# EAGLE board MiłoszGustawski (EAGLE 7.7.0)
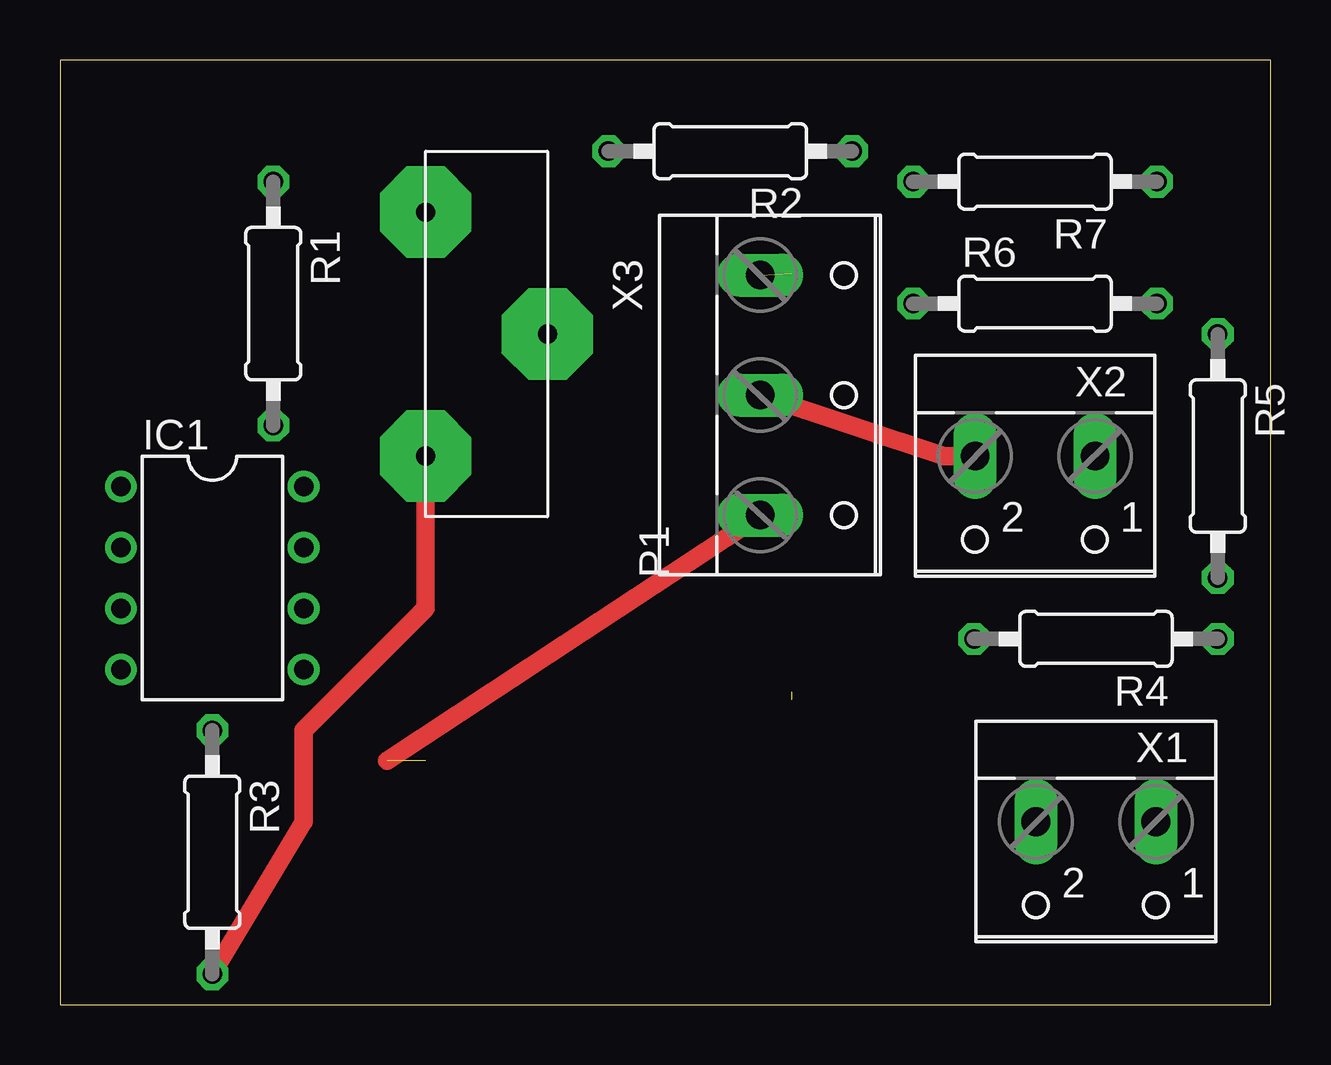
[diagram p0: board, top side]
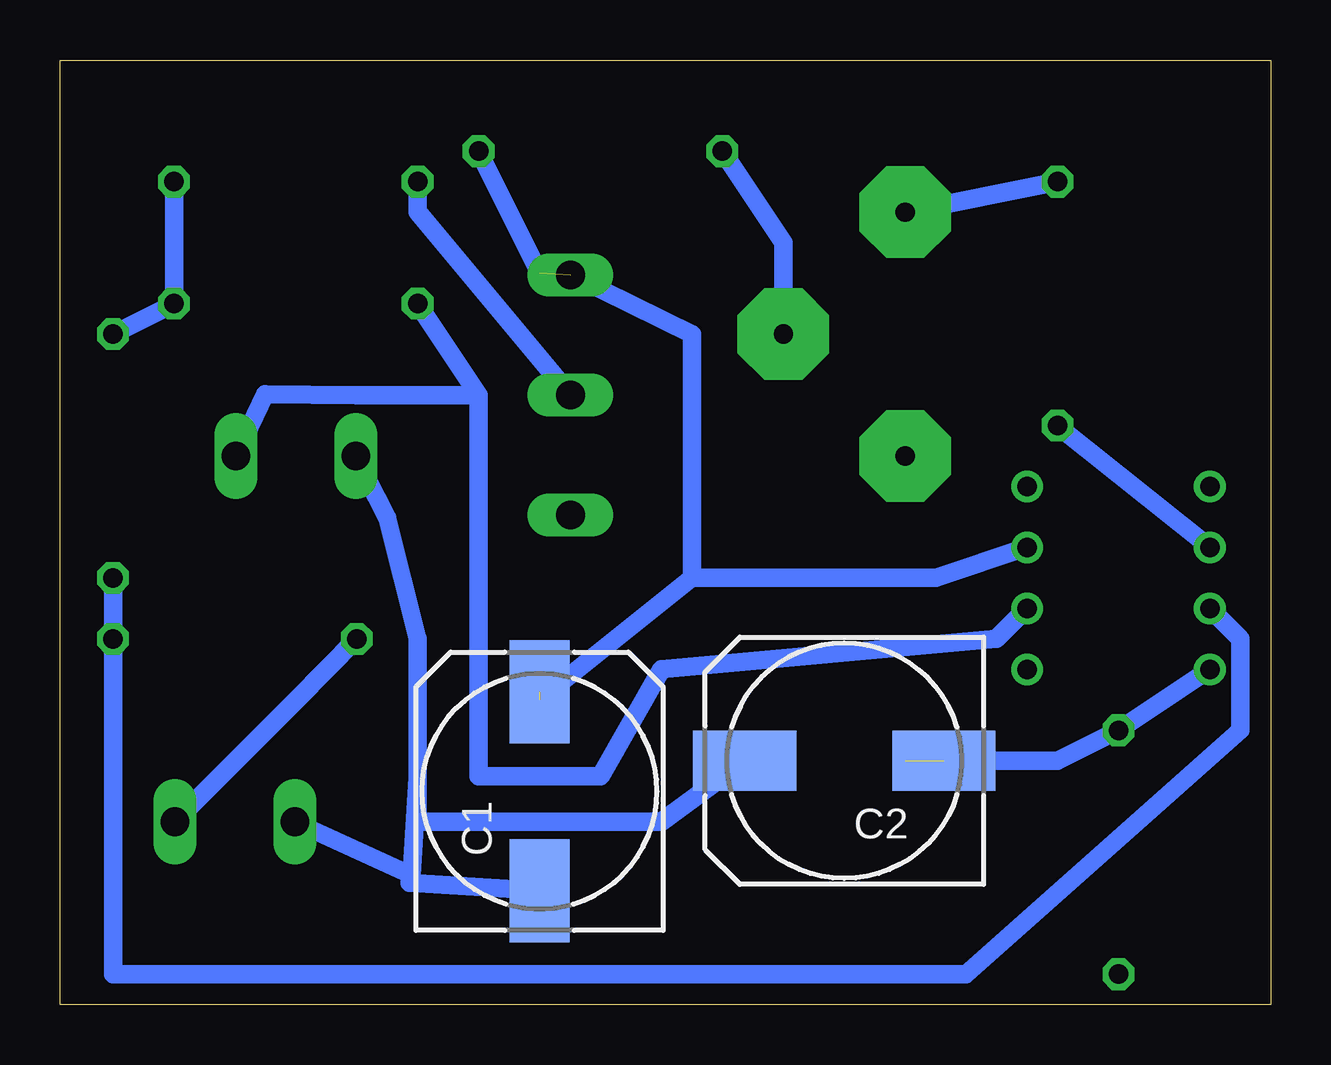
[diagram p1: board, bottom side, seen from below]

Size 50.47 x 39.36 mm. Coordinates in mm from the lower left corner, seen from the top.
Outline: 0,0 50.47,0 50.47,39.36 0,39.36 0,0
Copper layers (1*16): Top 0.035mm / dielectric 1.5mm / Bottom 0.035mm
Design rules "default": minimum track width 10mil, minimum drill 24mil, track to track 8mil, track to pad 8mil, pad to pad 8mil, via to via 8mil, smd to smd 8mil, copper to edge 40mil, drill to drill 8mil, minimum pad ring 10mil, minimum via ring 8mil, stop-mask expansion 4mil, vias tented up to drill 0mil, thermal gap 10mil

## Footprints (pad centres in the part's own frame; a part is rotated, then mirrored left to right if it is on the bottom)
140CLH-1014 = smd 4.3 x 2.5: + 4.15,0; - -4.15,0
DIL08 = drill 0.813 pad 1.27: 1 -3.81,-3.81; 2 -1.27,-3.81; 3 1.27,-3.81; 4 3.81,-3.81; 5 3.81,3.81; 6 1.27,3.81; 7 -1.27,3.81; 8 -3.81,3.81
CN15.2 = drill 0.8 pad 3.81 octagon: 1 -5.08,2.54; 2 5.08,2.54; 3 0,-2.54
0207/10 = drill 0.813 octagon: 1 -5.08,0; 2 5.08,0
W237-102 = drill 1.194 long: 1 -2.5,-1.27; 2 2.5,-1.27
W237-103 = drill 1.194 long: 1 -5,-1.29; 2 0,-1.29; 3 5,-1.29

## Placement (x,y rotation side)
C1  100u  [140CLH-1014]  30.48,8.89 90 bottom
C2  100u  [140CLH-1014]  17.78,10.16 180 bottom
IC1  UA741P  [DIL08]  6.35,17.78 270 top
P1  22k  [CN15.2]  17.78,27.94 90 top
R1  56k  [0207/10]  8.89,29.21 270 top
R2  130k  [0207/10]  27.94,35.56 180 top
R3  160k  [0207/10]  6.35,6.35 270 top
R4  56k  [0207/10]  43.18,15.24 180 top
R5  56k  [0207/10]  48.26,22.86 270 top
R6  82k  [0207/10]  40.64,29.21 0 top
R7  24k  [0207/10]  40.64,34.29 180 top
X1  [W237-102]  43.18,6.35 180 top
X2  [W237-102]  40.64,21.59 180 top
X3  [W237-103]  30.48,25.4 270 top

## Library data of the parts
C1 C2 R1-R7 = rcl
IC1 = linear
P1 = gustawski
X1 X2 = con-wago-500; MPN: 237-102; OC_FARNELL: unknown; OC_NEWARK: 70K9898
X3 = con-wago-500; MPN: 237-103; OC_FARNELL: unknown; OC_NEWARK: 18M7116

## Nets
+15V: C1.+ IC1.7 R2.1 X3.1
-15V: C2.- IC1.4 R3.1 X3.3
GND: C1.- C2.+ R7.2 X1.2 X2.2 X3.2
N$1: R4.2 X1.1
N$2: IC1.2 R1.2
N$3: P1.3 R2.2
N$4: P1.1 R3.2
N$5: P1.2 R1.1
N$6: IC1.3 R4.1 R5.2
N$7: R5.1 R6.2 R7.1
N$8: IC1.6 R6.1 X2.1

## Tracks (layer width: path | path; a pad name or v marks a point on that pad's centre or on a via)
+15V  (2 unrouted)
  Bottom 0.762: 30.48,30.48 R2.1 | 24.13,17.78 13.97,17.78 IC1.7 | 24.13,17.78 30.48,12.7 | X3.1 29.13,30.4 24.13,27.94 24.13,17.78
-15V  (2 unrouted)
  Top 0.762: X3.3 C2.-
  Bottom 0.762: IC1.4 R3.1 8.89,10.16 15.24,10.16
GND
  Top 0.762: X3.2 36.87,22.86 X2.2
  Bottom 0.762: X1.2 35.81,5.39 | 35.81,5.39 35.9,5.08 C1.- | C2.+ 25.4,7.62 35.56,7.62 35.56,9.46 | X2.2 36.83,20.28 35.56,15.24 35.56,9.46 | 35.56,9.46 35.81,5.39 | R7.2 35.56,33.04 X3.2
N$1
  Bottom 0.762: R4.2 40.6,12.7 X1.1
N$2
  Bottom 0.762: R1.2 IC1.2
N$3
  Bottom 0.762: P1.3 20.32,31.75 R2.2
N$4
  Top 0.762: R3.2 10.16,7.62 10.16,11.43 15.24,16.51 P1.1
N$5
  Bottom 0.762: R1.1 P1.2
N$6
  Bottom 0.762: R5.2 R4.1 48.26,1.27 12.7,1.27 1.27,11.43 1.27,15.24 IC1.3
N$7
  Bottom 0.762: R5.1 R6.2 R7.1
N$8
  Bottom 0.762: R6.1 33.02,25.4 | 33.02,25.4 38.1,25.4 41.91,25.44 X2.1 | 33.02,25.4 33.02,9.53 27.94,9.53 25.4,13.97 11.43,15.24 IC1.6